# Altium PCB PunkController-PCB.PcbDoc
Units mm, origin at the board's own origin, x right, y up, seen from the top; angles counter-clockwise.
Board outline 65 x 85 mm, 2 copper layers (Top Layer, Bottom Layer); 21 components, 32 nets, 107 pads, 20 vias.
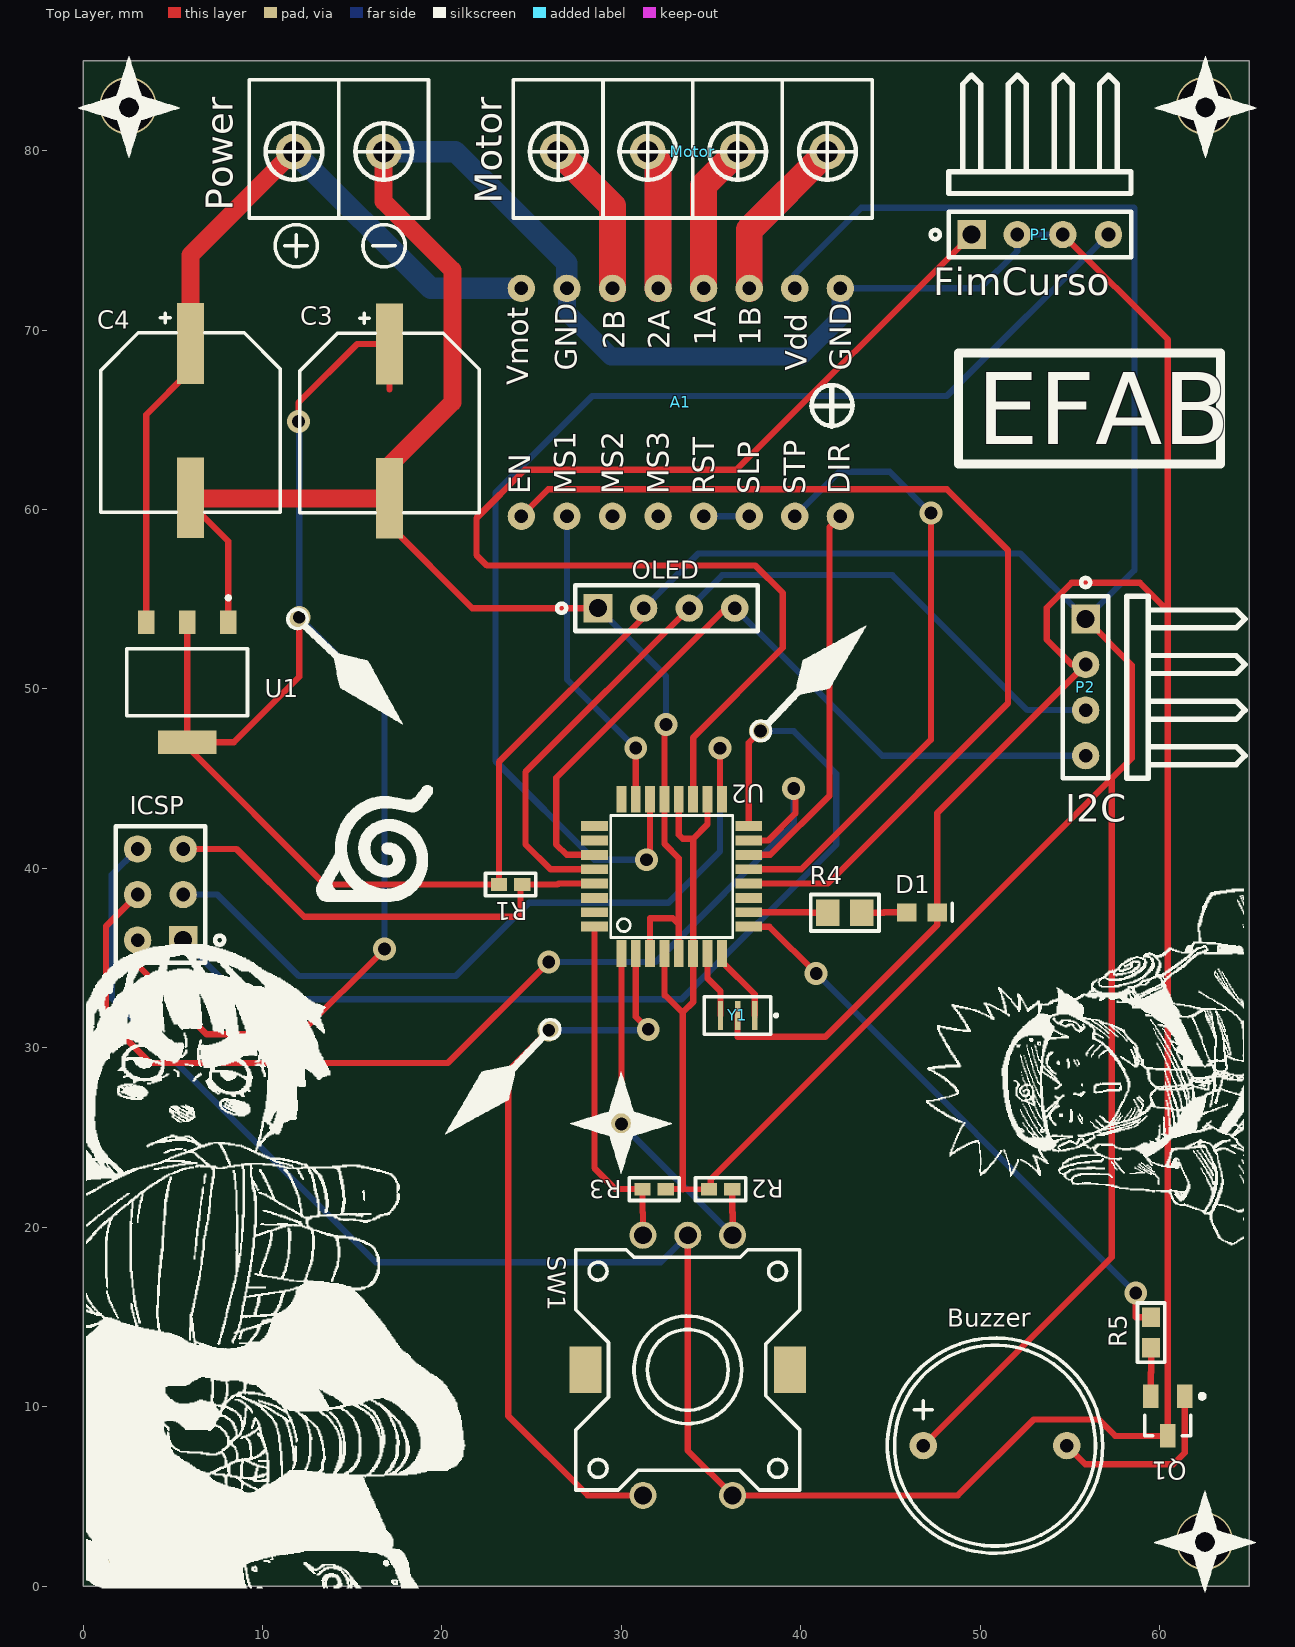
[diagram p0: Top Layer view]
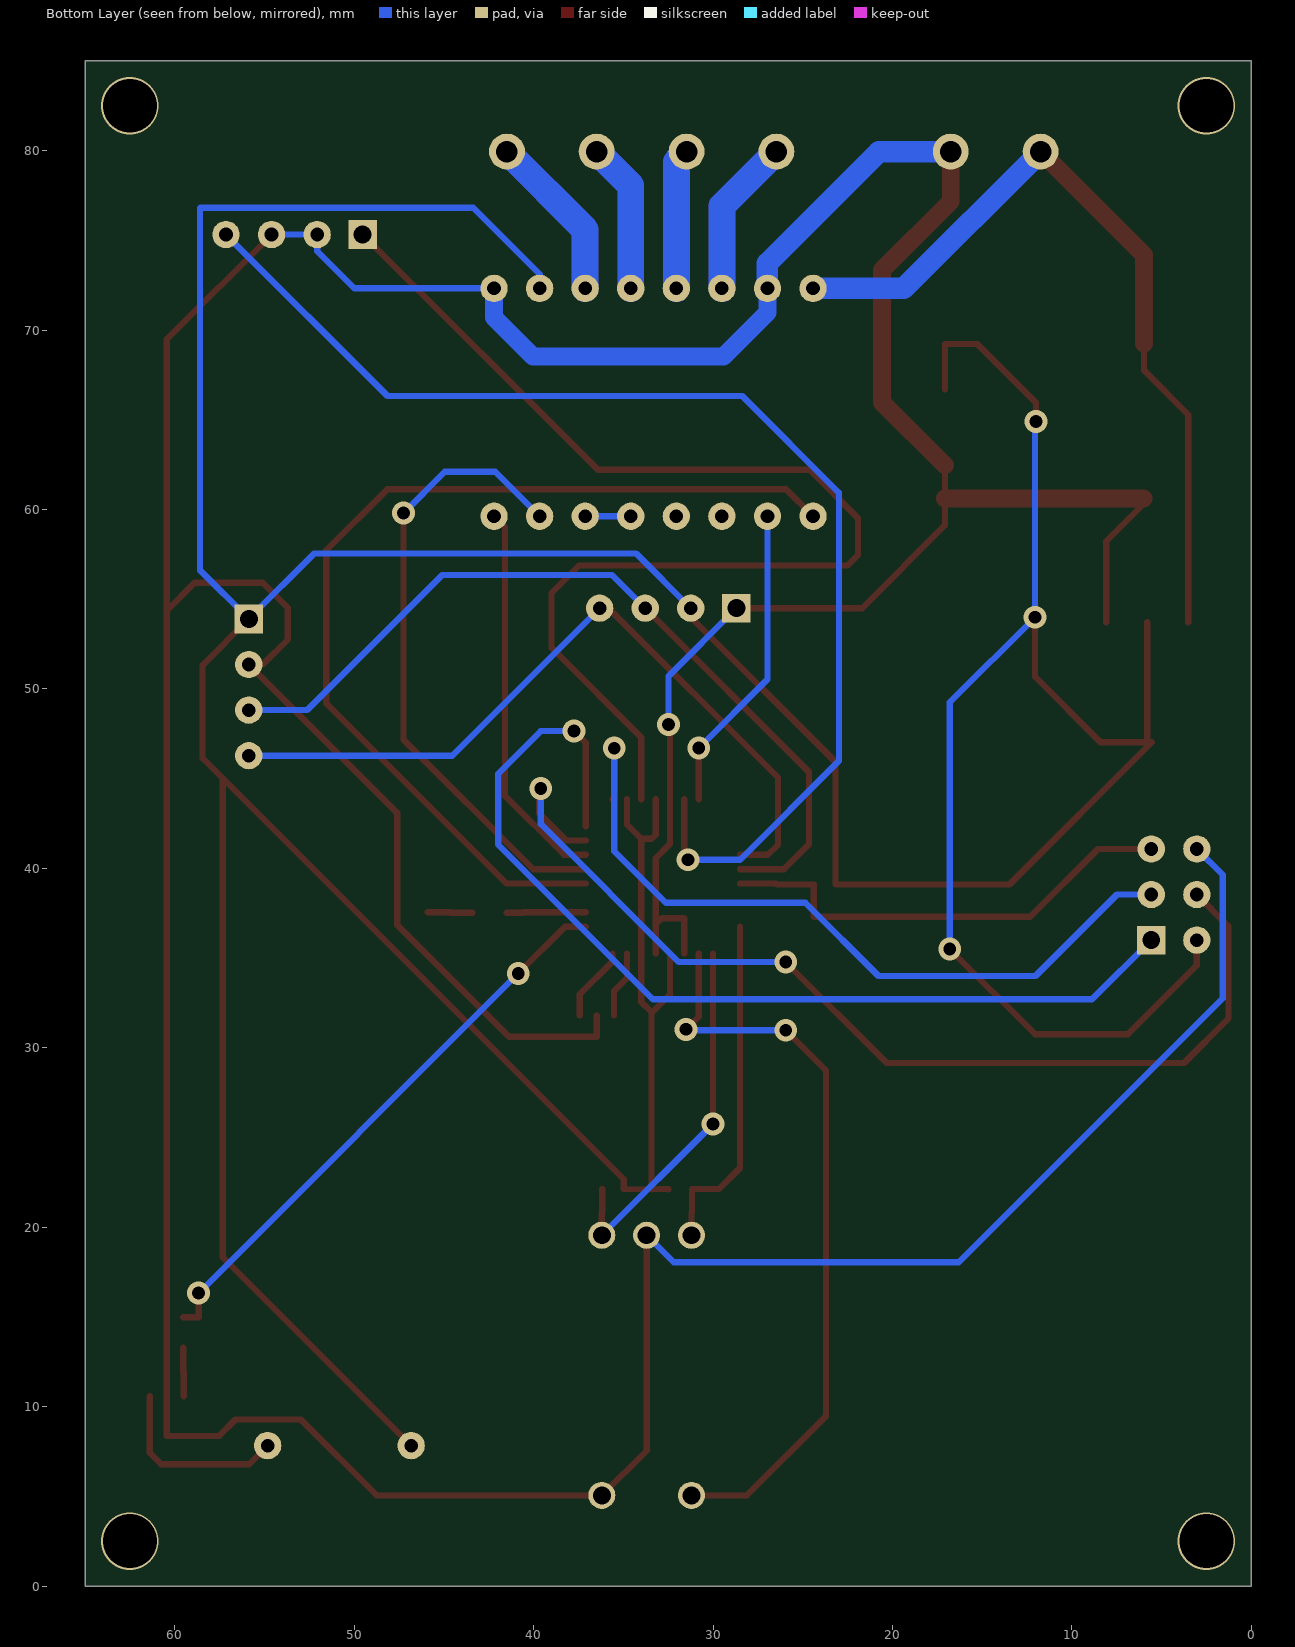
[diagram p1: Bottom Layer view, seen from below]
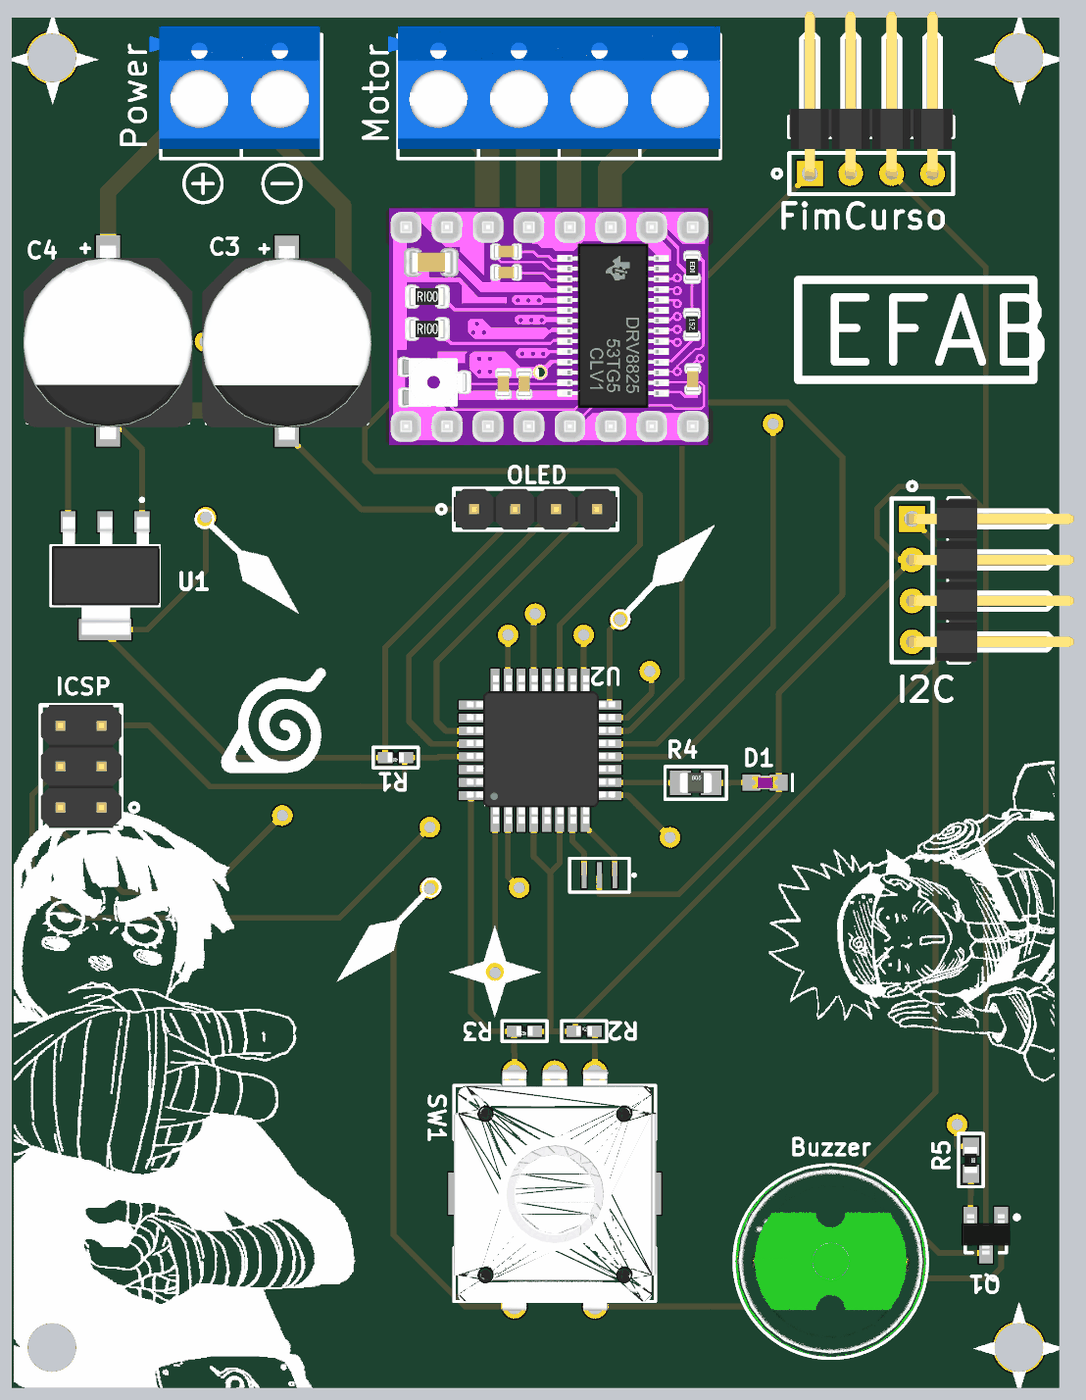
[diagram p2: 3D render of the assembled board from above, using the file's embedded part models]

## Layer stack, top to bottom
Top Solder: solder mask 0.0102, Solder Resist, Dk 3.5
Top Layer: signal copper 0.0356
Dielectric 1: dielectric 0.32, FR-4, Dk 4.8
Bottom Layer: signal copper 0.0356
Bottom Solder: solder mask 0.0102, Solder Resist, Dk 3.5

## Board outline
0,0 65,0 65,85 0,85

## Design rules (kind name [scope] priority, off if disabled: settings)
Clearance [All] p1: gap=0.2 ignorepadtopadclearanceinfootprint=FALSE except(0.3: Arc-Arc Arc-Track Arc-Via Track-Track Track-Via; 0.4: Via-Hole; 0.5: Arc-THPad Track-THPad; 0.8: Arc-Hole Track-Hole; 1: SMDPad-Hole THPad-Hole)
ComponentClearance [All] p1 off: gap=0.254 collisioncheckmode=3 verticalgap=0.254 showdistances=FALSE
Height [All] p1 off: minheight=0 maxheight=25.4 prefheight=12.7
PolygonConnect [All] p1: connectstyle=Relief reliefconductorwidth=0.254 reliefentries=4 polygonreliefangle="90 Angle" airgapwidth=0.254
RoutingVias [All] p1: holewidth=0.711 width=1.27 viastyle="Through Hole" minholewidth=0.711 minwidth=1.27 maxholewidth=0.711 maxwidth=1.27
SolderMaskExpansion [All] p1: expansion=0.102
Width [All] p1: maxlimit=1.5 minlimit=0.254 preferedwidth=0.35 minimp=50.000000 maximp=50.000000 favimp=50.000000
28 further rules are at their usual default settings.

## Components (designator, comment, footprint, x,y, rotation, side; value= is the part's Value field where it differs from the comment)
A1 "driver A4988" A4988 24.425,59.625 r90 top
Buzzer "Buzzer" "BUZZER 12MM" 50.825,7.825 r0 top (schematic designator Buzzer1)
C3 "Capacitor Pol" CAP_AL_SMD_C6_10X10MM 17.075,64.825 r90 top
C4 "470uf" CAP_AL_SMD_C6_10X10MM 5.975,64.85 r90 top
D1 "LED" LED-0603-R 46.75,37.55 r0 top
ICSP "Header 3X2" HDR2X3M 5.575,36 r180 top
Motor "Motor" KRE-4 23.975,76.25 r0 top locked
OLED "Header 1x4" HDR1X4M 28.7,54.5 r0 top
P1 "FimCurso" HDR1X4-D 49.525,75.325 r0 top
P2 "I2C" HDR1X4-D 55.875,53.9 r270 top
Power "Power" KRE-2 9.25,76.25 r0 top
Q1 "NPN" SOT23 60.45,9.475 r180 top
R1 "10k" R1005[0402] 23.825,39.1 r180 top value=0
R2 "10k" R1005[0402] 35.525,22.125 r0 top value=0
R3 "10k" R1005[0402] 31.825,22.125 r180 top value=0
R4 "10k" R2012[0805] 42.45,37.525 r0 top value=0
R5 "10k" R1608[0603] 59.525,14.125 r270 top value=0
SW1 "PEC11R-4215F-S0024" ENCODER 33.7,12.05 r180 top
U1 "AMS1117" AMS1117 5.8,50.375 r270 top
U2 "ATMEGA328P-MU" "ATMEGA SMD" 32.8,39.55 r90 top
Y1 "Crystal-SMD" CRYSTAL-SMD 36.475,31.8 r180 top

## Footprints (in the part's own frame and the unit in brackets; to place one, negate y for a bottom-side part, rotate by r counter-clockwise, add the part's x,y. Pads: shape width x height; smd on the part's side, far side on the other; paste and mask are expansions set on the pad)
A4988 [mil]
  round 60 hole 30: 1(0,0) 2(0,-100) 3(0,-200) 4(0,-300) 5(0,-400) 6(0,-500) 7(0,-600) 8(0,-700) 9(500,-700) 10(500,-600) 11(500,-500) 12(500,-400) 13(500,-300) 14(500,-200) 15(500,-100) 16(500,0)
  silkscreen extent 197,-727 288,-637, body extent -48,-752 536,48, height 242
AMS1117 [mm]
  rect 1.31x0.93 smd: 1(-3.345,2.29) 2(-3.345,0) 3(-3.345,-2.29)
  rect 1.31x3.24 smd: 4(3.345,0)
  silkscreen extent -4.8,-3.36 1.86,3.36, body extent -3.65,-3.3 3.65,3.4, height 1.8
"ATMEGA SMD" [mm]
  rect 1.5x0.55 smd: 1(-4.3,2.8) 2(-4.3,2) 3(-4.3,1.2) 4(-4.3,0.4) 5(-4.3,-0.4) 6(-4.3,-1.2) 7(-4.3,-2) 8(-4.3,-2.8) 17(4.3,-2.8) 18(4.3,-2) 19(4.3,-1.2) 20(4.3,-0.4) 21(4.3,0.4) 22(4.3,1.2) 23(4.3,2) 24(4.3,2.8)
  rect 0.55x1.5 smd: 9(-2.8,-4.3) 10(-2,-4.3) 11(-1.2,-4.3) 12(-0.4,-4.3) 13(0.4,-4.3) 14(1.2,-4.3) 15(2,-4.3) 16(2.8,-4.3) 25(2.8,4.3) 26(2,4.3) 27(1.2,4.3) 28(0.4,4.3) 29(-0.4,4.3) 30(-1.2,4.3) 31(-2,4.3) 32(-2.8,4.3)
  silkscreen extent -3.4,-3.4 3.4,3.4, body extent -4.55,-4.65 4.65,4.55, height 1.2
"BUZZER 12MM" [mil]
  round 60 hole 30: 1(-157.48,0) 2(157.48,0)
  silkscreen extent -236,-236 236,236, body extent -233,-232 233,234, height 325
CAP_AL_SMD_C6_10X10MM [mm]
  rect 4.5x1.5 smd: 1(4.4,0) 2(-4.2,0)
  silkscreen extent -5,-5 6.1,5, body extent -6,-5.25 6,5.25, height 10.5
CRYSTAL-SMD [mm]
  rect 0.3x1.6 smd: 1(-0.95,0) 2(0,0) 3(0.95,0)
  silkscreen extent -2.22,-1.05 1.85,1.05
ENCODER [mm] "Hw-040"
  round 1.508 hole 1: 1(-2.5,7) 2(2.5,7) A(-2.5,-7.5) B(2.5,-7.5) C(0,-7.5)
  rect 1.8x2.6 smd: P1(-5.7,0) P2(5.7,0)
  silkscreen extent -6.25,-6.7 6.25,6.7, body extent -6.98,-7.68 6.92,7.25, height 26.5
HDR1X4-D [mil]
  rect 62.99x62.99 hole 39.37: 1(0,0)
  round 60 hole 30: 2(100,0) 3(200,0) 4(300,0)
  silkscreen extent -90,-50 350,350, body extent -50,-13 350,395, height 98
HDR1X4M [mil]
  rect 62.99x62.99 hole 39.37: 1(0,0)
  round 60 hole 30: 2(100,0) 3(200,0) 4(300,0)
  silkscreen extent -90,-50 350,50, body extent -50,-50 350,50, height 339
HDR2X3M [mil]
  rect 62.99x62.99 hole 39.37: 1(0,0)
  round 60 hole 30: 2(100,0) 3(0,-100) 4(100,-100) 5(0,-200) 6(100,-200)
  silkscreen extent -90,-250 148,50, body extent -48,-250 148,50, height 94
KRE-2 [mm]
  round 2 hole 1.2: 1(2.491,3.7) 2(7.5,3.7)
  silkscreen extent 0,0 10,7.7, body extent -0.7,0.6 9.9,8.2, height 10
KRE-4 [mm]
  round 2 hole 1.2: 1(2.491,3.7) 2(7.5,3.7) 3(12.509,3.7) 4(17.509,3.7)
  silkscreen extent 0,0 20,7.7, body extent -0.6,0.6 20,8.2, height 10
LED-0603-R [mm] "0603 Red LED"
  rect 1.1x1 smd: 1(-0.85,0) 2(0.85,0)
  silkscreen extent 1.7,-0.5 1.7,0.5, body extent -0.8,-0.4 0.8,0.4, height 0.6
R1005[0402] [mm] "Chip Resistor; Body 1.1 x 0.5 mm (LxW typ)"
  rect 0.9x0.7 smd: 1(-0.65,0) 2(0.65,0)
  silkscreen extent -1.4,-0.64 1.4,0.63, body extent -0.5,-0.3 0.5,0.3, height 0.2
R1608[0603] [mm] "Chip Resistor; Body 1.6 x 0.8 mm (LxW typ)"
  rect 1.1x1 smd: 1(-0.85,0) 2(0.85,0)
  silkscreen extent -1.65,-0.76 1.65,0.76, body extent -0.8,-0.4 0.8,0.4, height 0.3
R2012[0805] [mm] "Chip Resistor; Body 2.0 x 1.3 mm (LxW typ)"
  rect 1.3x1.5 smd: 1(-0.95,0) 2(0.95,0)
  silkscreen extent -1.91,-1.02 1.9,1.02, body extent -1,-0.62 1,0.63, height 0.8
SOT23 [mm] "SOT-23; 3 Leads; Body 3.0 x 2.6 mm, inc. leads (LxW max)"
  rect 0.85x1.3 smd: 1(-0.95,-1.1) 2(0.95,-1.1) 3(0,1.1)
  silkscreen extent -2.05,-1.22 1.28,1.1, body extent -1.5,-1.29 1.5,1.21, height 1.12

## Part data
C3 C4: library part CP, "Polarized Capacitor"
ICSP: "Header, 3-Pin, Dual row", LatestRevisionDate=17-Jul-2002, LatestRevisionNote="Re-released for DXP Platform.", Publisher="Altium Limited"
Motor P1 P2: library part "Header 1x4"
Power: library part "Header 2"
Q1: "NPN Bipolar Transistor"
R1 R2 R3 R4 R5: library part R, "Resistor"
SW1: library part Encoder, "Incremental Encoder, 12 Mm, Contact Rating 10 Ma - 5 Vdc", Package=None, Availability=Unavailable, MF=Bourns, MP=PEC11R-4215F-S0024, Price=None, SnapEDA_Link=https://www.snapeda.com/parts/PEC11R-4215F-S0024/Bourns%20-%20J.W.%20Miller/view-part/?ref=snap
U2: library part ATMEGA328P-MU-SMD, "Embedded microcontroller ATMEGA328P-MU VQFN 32 _5x5_ Microchip Technology 8-Bit 20 MHz I/O number 23", Package="VQFN-32 Microchip", Availability=Unavailable, MF=Microchip, MP=ATMEGA328P-MU, Price=None, SnapEDA_Link=https://www.snapeda.com/parts/ATMEGA328P-MU/Microchip/view-part/?ref=snap

## Via types
v1: diameter 1.27, hole 0.711, Top Layer to Bottom Layer, 16 vias
v2: diameter 3.2, hole 3, Top Layer to Bottom Layer, 4 vias

## Nets (pads, with @x,y where several pads share a name; then routed paths per layer and width w, separated by ;. In a path a pad name is that pad's centre, name@x,y a point inside that pad or via, vN(x,y) a via of type N, cw(c..) or ccw(c..) an arc to the next point about the centre after c; other vN are vias at no path point)
+5: A1.10 Buzzer.1 C3.1 ICSP.2 OLED.2 P2.1 R1.2 R2.1 R3.1 U1.2 U1.4 U2.4 U2.6 U2.18 U2.20 | length 307
  Top Layer w0.35: ICSP.2 3.035,34.59 6.875,30.75 12.05,30.75 v1(16.8,35.5) ; U1.2 U1.4 ; v1(12,64.9) 12,65.95 15.275,69.225 C3.1 17.075,66.683 ; v1(12.05,54) 12.05,50.675 8.405,47.03 U1.4 ; R1.2@23.162,39.1 13.475,39.1 5.545,47.03 U1.4 ; R1.2 23.175,45.925 31.24,53.99 OLED.2 ; U2.4 32.4,32.975 ; U2.20 33.2,41.875 33.423,41.652 34,41.652 ; U2.18 34.8,42.452 34,41.652 ; Buzzer.1 57.325,18.325 57.325,45.017 ; P2.1 58.45,51.325 58.45,46.142 57.325,45.017 ; 32.4,32.975 32.45,32.925 ; 32.4,32.975 32.4,32.925 32.45,32.925 ; 32.45,32.925 33.425,31.95 ; 33.425,31.95 33.425,31.975 34,32.55 U2.6 34,41.652 ; 33.425,31.95 33.425,22.115 32.5,22.125 32.5,22.1 R2.1 34.973,22.125 34.973,22.665 57.325,45.017
  Bottom Layer w0.35: v1(12,64.9) 12.05,64.85 v1(12.05,54) 16.8,49.25 v1(16.8,35.5) ; OLED.2 34.29,57.55 52.225,57.55 P2.1 58.595,56.62 58.595,76.792 58.57,76.818 43.368,76.818 39.665,73.115 A1.10
GND: A1.9 A1.15 C3.2 C4.2 D1.2 ICSP.6 OLED.1 P1.2 P1.3 P2.2 Power.2 Q1.3 SW1.1 SW1.C U1.1 U2.3 U2.5 U2.21 Y1.2 | length 334.1
  Top Layer w0.35: C4.2@6,60.625 C4.2 5.975,60.347 8.09,58.232 U1.1 ; C3.2@17.075,62.467 C3.2 17.075,59.114 21.689,54.5 OLED.1 ; U2.3 31.6,37.224 32.86,37.224 33.2,36.884 ; v1(32.484,48.014) 32.4,47.93 U2.21 32.4,41.36 33.2,40.56 33.2,36.884 ; U2.5 33.2,36.884 ; SW1.C 33.7,7.55 SW1.1 48.753,5.05 52.982,9.279 56.614,9.279 57.528,8.365 60.45,8.365 Q1.3 60.45,54.364 ; Y1.2 36.475,30.615 41.374,30.615 47.6,36.841 D1.2 47.6,43.085 P2.2 55.09,51.36 53.7,52.75 53.7,54.524 55.09,55.914 58.9,55.914 60.45,54.364 ; P1.3 60.45,69.48 60.45,54.364
  Top Layer w1: C4.2@6,60.625 C3.2 ; Power.2 16.75,77.175 20.575,73.35 20.575,65.967 C3.2@17.075,62.467
  Bottom Layer w0.35: ICSP.6 1.598,39.643 1.598,32.752 16.308,18.042 32.192,18.042 SW1.C ; OLED.1 32.484,50.716 v1(32.484,48.014) ; A1.9 49.988,72.325 52.065,74.402 P1.2 P1.3
  Bottom Layer w1: A1.15 26.965,70.985 29.425,68.525 40.025,68.525 42.205,70.705 A1.9
  Bottom Layer w1.2: Power.2 20.75,79.95 26.965,73.735 A1.15
NetA1_1: A1.1 U2.12 | length 56.3
  Top Layer w0.35: A1.1 25.931,61.131 48.144,61.131 51.55,57.725 51.55,49.2 41.5,39.15 U2.12
NetA1_2: A1.2 U2.23 | length 17.4
  Top Layer w0.35: U2.23 v1(30.8,46.701)
  Bottom Layer w0.35: A1.2 26.965,50.536 v1(30.8,46.701)
NetA1_3: A1.3
NetA1_4: A1.4
NetA1_5: A1.5 A1.6 | length 2.5
  Bottom Layer w0.35: A1.5 A1.6
NetA1_7: A1.7 U2.13 | length 35.3
  Top Layer w0.35: U2.13 40.025,39.95 47.25,47.175 v1(47.25,59.8)
  Bottom Layer w0.35: A1.7 42.14,62.1 44.95,62.1 v1(47.25,59.8)
NetA1_8: A1.8 U2.14 | length 21.7
  Top Layer w0.35: U2.14 38.301,40.75 41.6,44.049 41.6,59.02 A1.8
NetA1_11: A1.11 Motor.4 | length 18.9
  Top Layer w1.5: A1.11 37.125,75.591 Motor.4
  Bottom Layer w1.5: A1.11 37.125,75.591 Motor.4
NetA1_12: A1.12 Motor.3 | length 16.8
  Top Layer w1.5: A1.12 34.585,78.051 Motor.3
  Bottom Layer w1.5: A1.12 34.585,78.051 Motor.3
NetA1_13: A1.13 Motor.2 | length 15.7
  Top Layer w1.5: Motor.2 32.045,79.38 A1.13
  Bottom Layer w1.5: Motor.2 32.045,79.38 A1.13
NetA1_14: A1.14 Motor.1 | length 17.8
  Top Layer w1.5: Motor.1 29.505,76.911 A1.14
  Bottom Layer w1.5: Motor.1 29.505,76.911 A1.14
NetBuzzer1_2: Buzzer.2 Q1.1 | length 10.4
  Top Layer w0.35: Buzzer.2 55.86,6.79 60.765,6.79 61.4,7.425 Q1.1
NetD1_1: D1.1 R4.2 | length 2.5
  Top Layer w0.35: R4.2 44.625,37.525 44.65,37.55 D1.1
NetICSP_1: ICSP.1 U2.16 | length 56.1
  Top Layer w0.35: U2.16 37.1,47 v1(37.75,47.65)
  Bottom Layer w0.35: ICSP.1 8.875,32.7 33.35,32.7 41.975,41.325 41.975,45.275 39.6,47.65 v1(37.75,47.65)
NetICSP_3: ICSP.3 U2.17 | length 43.3
  Top Layer w0.35: v1(35.5,46.7) 35.5,43.95 U2.17
  Bottom Layer w0.35: ICSP.3 7.485,38.54 12.025,34 20.775,34 24.85,38.075 32.625,38.075 35.5,40.95 v1(35.5,46.7)
NetICSP_4: ICSP.4 U2.15 | length 59.1
  Top Layer w0.35: ICSP.4 1.275,36.78 1.275,31.625 3.75,29.15 20.325,29.15 v1(25.95,34.775) ; U2.15 38.181,41.55 39.7,43.069 39.7,44.35 v1(39.6,44.45)
  Bottom Layer w0.35: v1(25.95,34.775) 31.9,34.775 39.6,42.475 v1(39.6,44.45)
NetICSP_5: ICSP.5 R1.1 U2.29 | length 26.3
  Top Layer w0.35: ICSP.5 8.545,41.08 12.319,37.306 24.381,37.306 24.381,39.1 R1.1 26.439,39.1 26.489,39.15 U2.29
NetOLED_3: OLED.3 P2.3 U2.28 | length 47.3
  Top Layer w0.35: U2.28 26.05,39.95 24.65,41.35 24.65,45.37 OLED.3
  Bottom Layer w0.35: OLED.3 35.625,56.345 45.105,56.345 52.63,48.82 P2.3
NetOLED_4: OLED.4 P2.4 U2.27 | length 42.9
  Top Layer w0.35: U2.27 26.95,40.75 26.375,41.325 26.375,45.05 35.825,54.5 OLED.4
  Bottom Layer w0.35: OLED.4 44.54,46.28 P2.4
NetP1_1: P1.1 U2.19 | length 67.7
  Top Layer w0.35: U2.19 34,47.295 39,52.295 39,55.35 37.475,56.875 22.51,56.875 21.925,57.46 21.925,59.528 24.61,62.213 36.413,62.213 P1.1
NetP1_4: P1.4 U2.22 | length 69.2
  Top Layer w0.35: v1(31.4,40.479) 31.6,40.679 U2.22
  Bottom Layer w0.35: v1(31.4,40.479) 28.491,40.479 22.984,45.985 22.984,60.943 28.367,66.325 48.145,66.325 P1.4
NetQ1_2: Q1.2 R5.2 | length 2.7
  Top Layer w0.35: Q1.2 59.5,11.895 59.525,11.92 R5.2
NetR2_2: R2.2 SW1.A U2.1 | length 20.9
  Top Layer w0.35: v1(30,25.75) U2.1 ; R2.2 36.175,20.836 36.2,20.811 SW1.A
  Bottom Layer w0.35: v1(30,25.75) SW1.A
NetR3_2: R3.2 SW1.B U2.32 | length 19.2
  Top Layer w0.35: U2.32 28.496,36.75 28.496,23.3 29.671,22.125 R3.2 31.175,20.836 31.2,20.811 SW1.B
NetR4_1: R4.1 U2.10 | length 4.4
  Top Layer w0.35: U2.10 40.558,37.55 40.583,37.525 R4.1
NetR5_1: R5.1 U2.9 | length 32.2
  Top Layer w0.35: U2.9 38.25,36.75 v1(40.854,34.146) ; v1(58.671,16.328) 58.671,14.975 R5.1
  Bottom Layer w0.35: v1(40.854,34.146) v1(58.671,16.328)
NetSW1_2: SW1.2 U2.2 | length 41.9
  Top Layer w0.35: v1(25.95,30.975) 23.7,28.725 23.7,9.475 28.125,5.05 SW1.2 ; U2.2 30.8,31.725 v1(31.5,31.025) v1@31.5,30.95
  Bottom Layer w0.35: v1(25.95,30.975) 31.45,30.975 v1(31.5,31.025)
NetU2_7: U2.7 Y1.3 | length 3.8
  Top Layer w0.35: U2.7 34.8,33.88 35.525,33.155 Y1.3
NetU2_8: U2.8 Y1.1 | length 4.2
  Top Layer w0.35: U2.8 35.6,34.806 37.425,32.981 Y1.1
VCC: A1.16 C4.1 Power.1 U1.3 | length 45.5
  Top Layer w0.35: U1.3 3.51,65.285 5.975,67.75 C4.1
  Top Layer w1: C4.1 5.975,74.184 Power.1
  Bottom Layer w1.2: Power.1 19.366,72.325 A1.16
pads on no net: SW1.P1 SW1.P2 U2.11 U2.24 U2.25 U2.26 U2.30 U2.31
copper on no net:
  other v2: 2.5,2.5 62.5,2.5 2.5,82.5 62.5,82.5

## Silkscreen, mask and mechanical layers (free items; w line width, h text height)
Top Overlay:
  drawing of 12633 lines, arcs and shapes, not listed
  text "EFAB" at 49.8,63.625 h4
Mechanical 15:
  the board outline again, w0.1

## Text inside footprints (layer, text, board x,y; h text height)
A1: Top Overlay "Vmot" at 24.806,66.928 h1.2 r90; Top Overlay "GND" at 27.524,67.728 h1.2 r90; Top Overlay "2B" at 30.191,68.927 h1.2 r90; Top Overlay "2A" at 32.705,68.927 h1.2 r90; Top Overlay "1A" at 35.245,69.127 h1.2 r90; Top Overlay "1B" at 37.76,69.127 h1.2 r90; Top Overlay "Vdd" at 40.325,67.728 h1.2 r90; Top Overlay "GND" at 42.815,67.728 h1.2 r90; Top Overlay "DIR" at 42.738,60.844 h1.2 r90; Top Overlay "STP" at 40.249,60.844 h1.2 r90; Top Overlay "SLP" at 37.684,60.844 h1.2 r90; Top Overlay "RST" at 35.169,60.844 h1.2 r90; Top Overlay "MS3" at 32.629,60.844 h1.2 r90; Top Overlay "MS2" at 30.115,60.844 h1.2 r90; Top Overlay "MS1" at 27.448,60.844 h1.2 r90; Top Overlay "EN" at 24.933,60.844 h1.2 r90